# Altium PCB EboxPCB.PcbDoc
Units mil, origin at the board's own origin, x right, y up, seen from the top; angles counter-clockwise.
Board outline 6533 x 3937.01 mil, 2 copper layers (Signal, Ground); 45 components, 32 nets, 81 pads, 0 vias.
Unrouted connection lines stored in the file: 16.
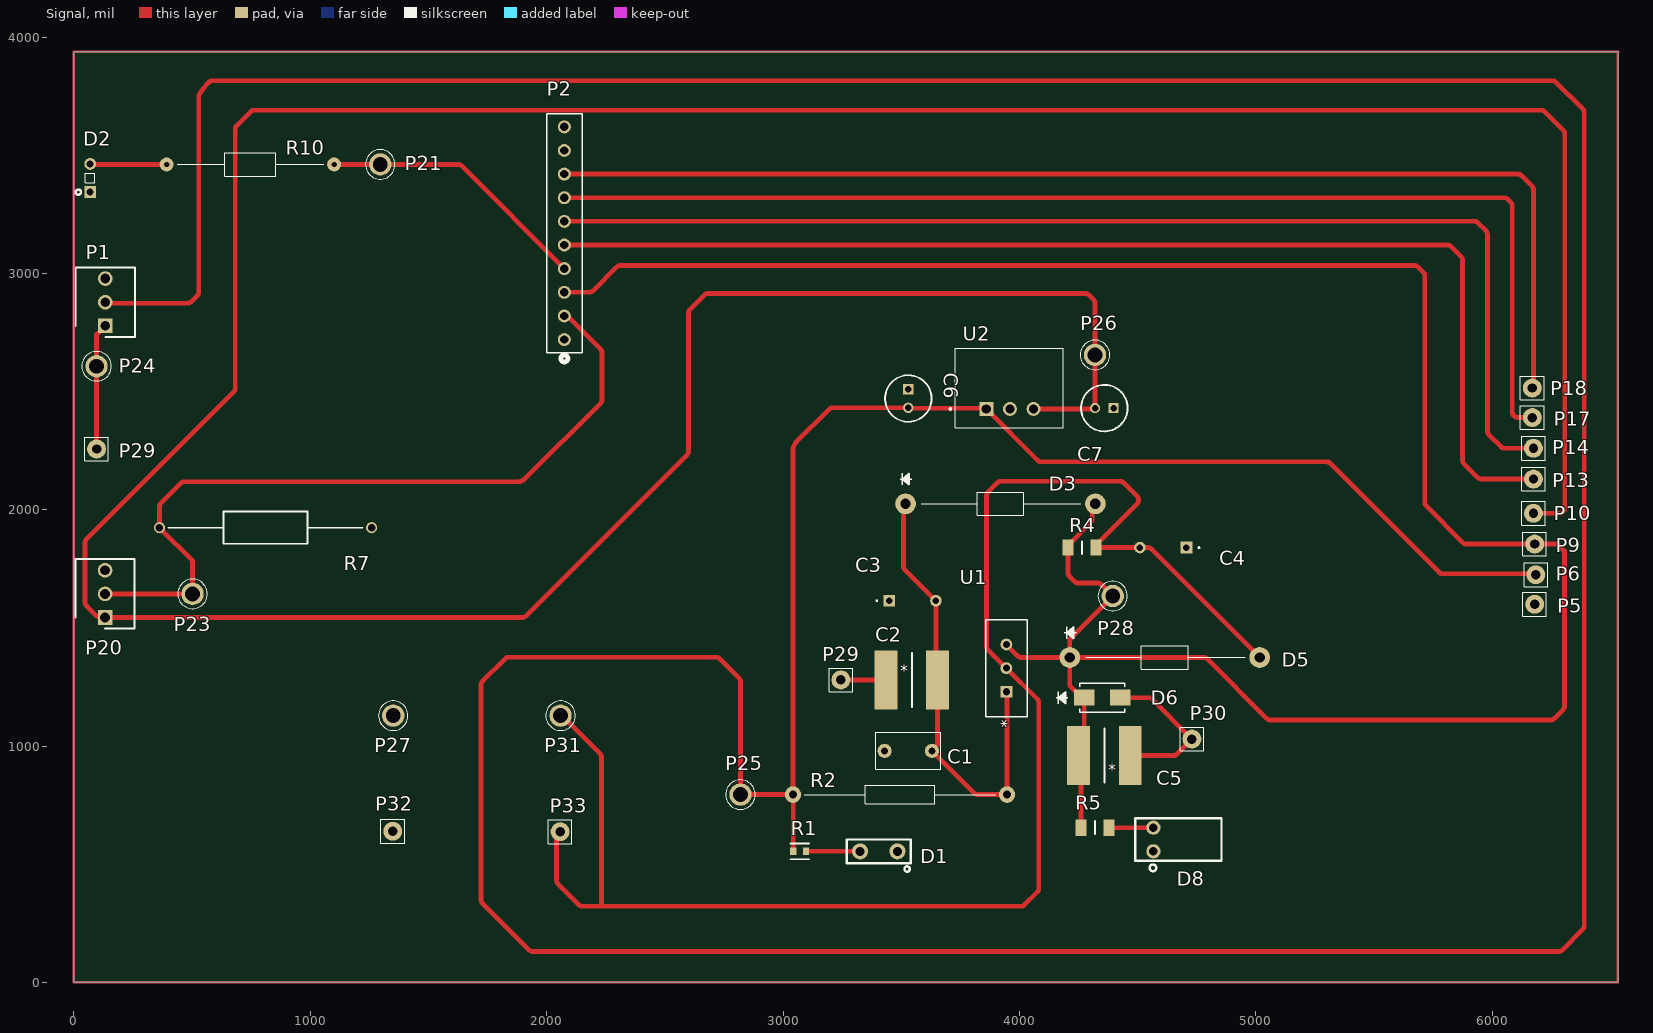
[diagram p0: Signal view]
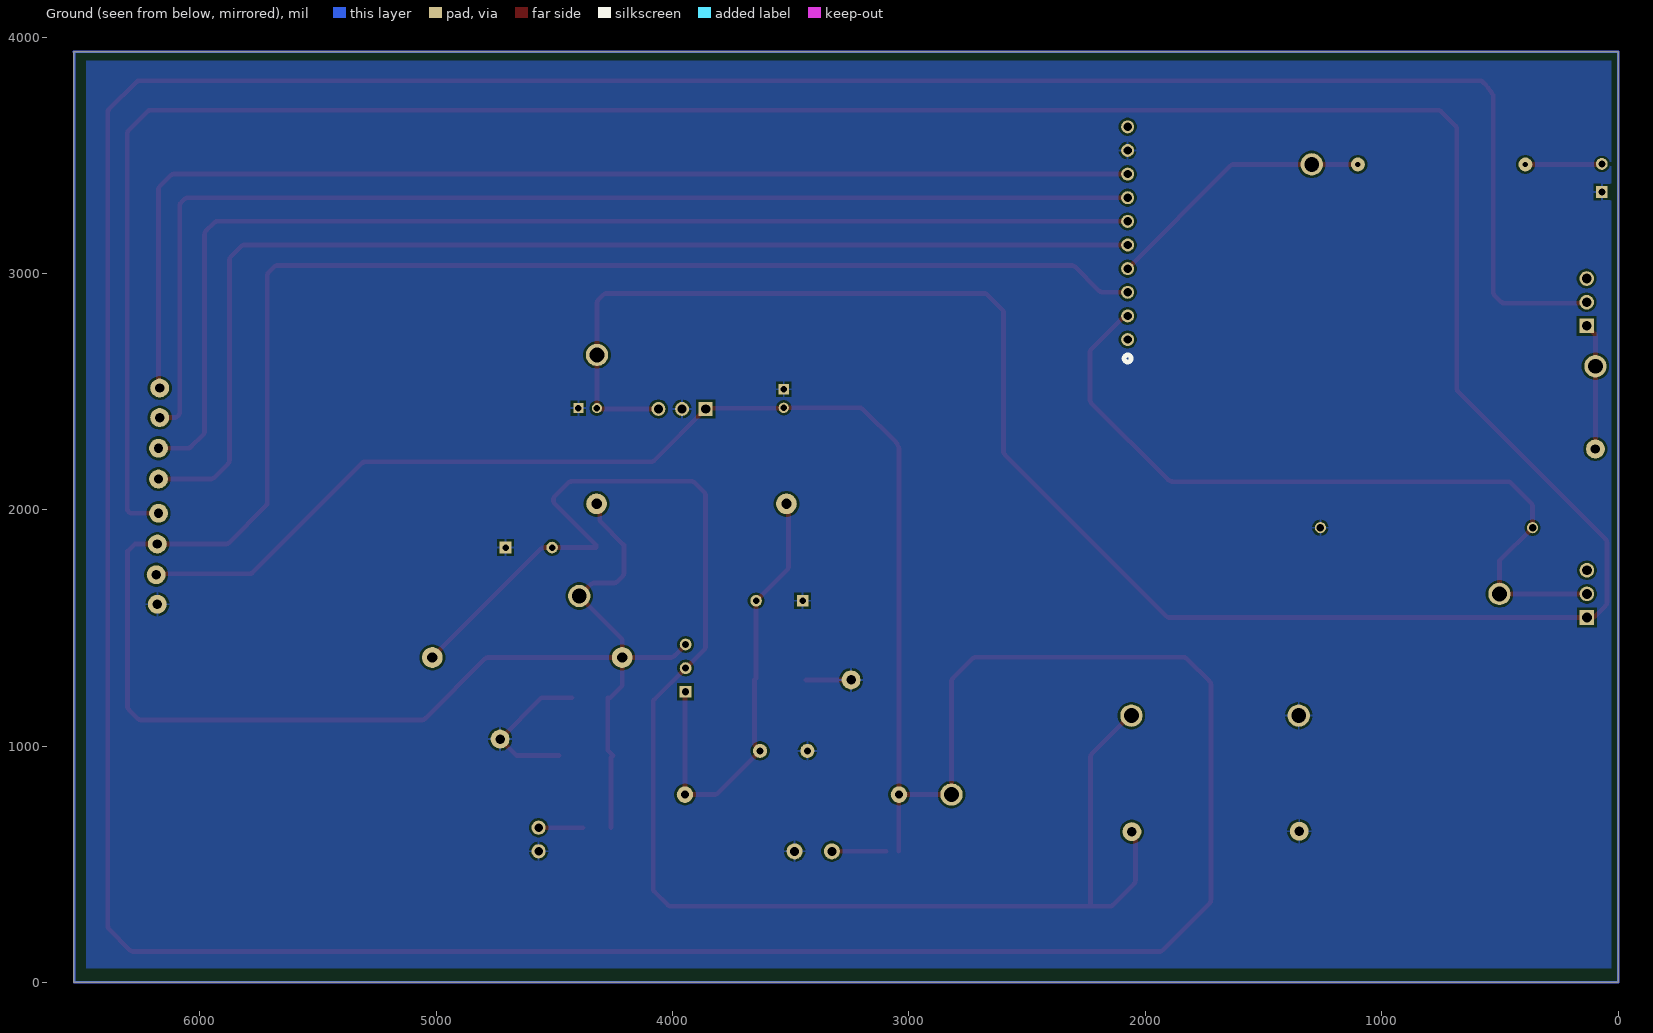
[diagram p1: Ground view, seen from below]
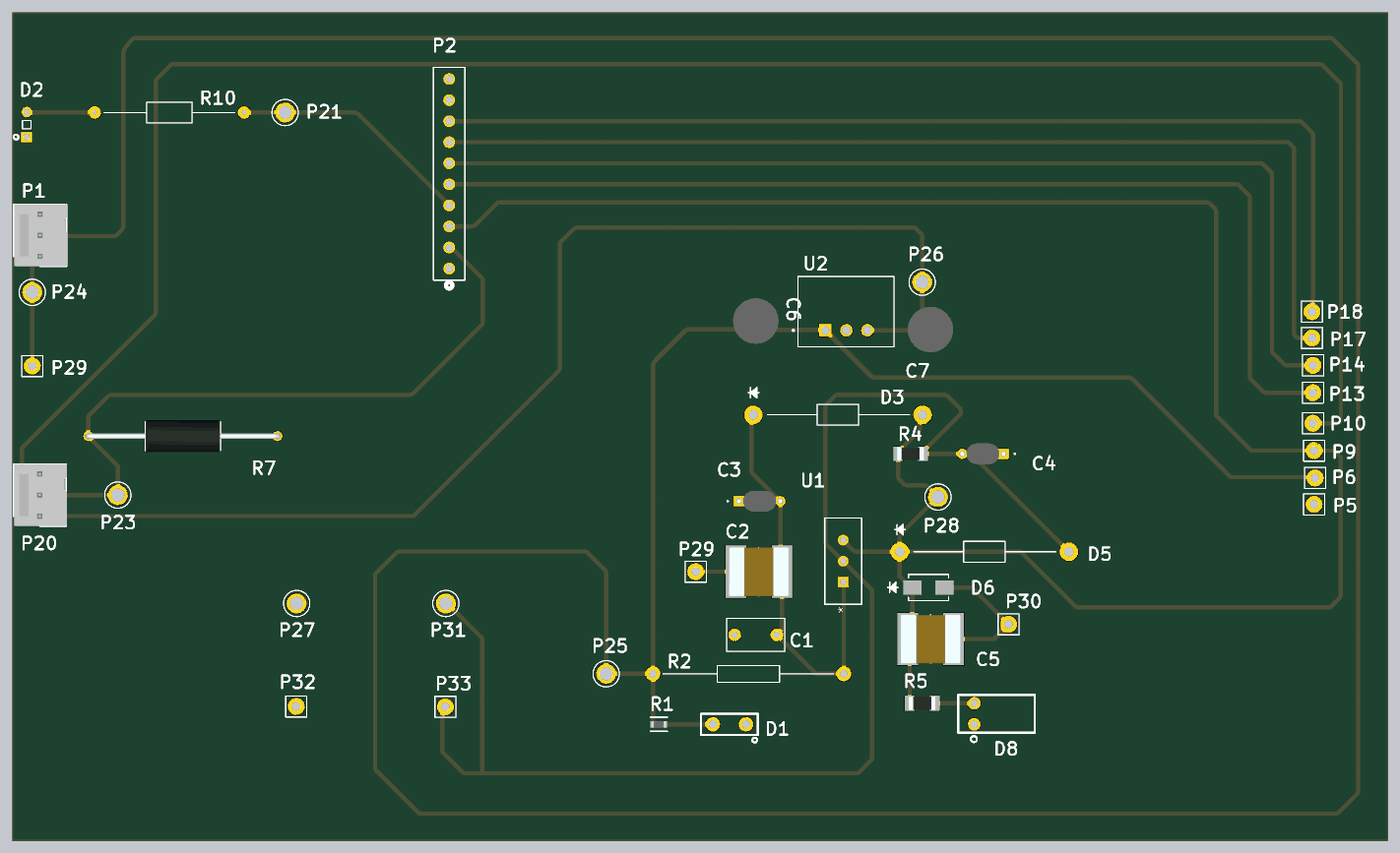
[diagram p2: 3D render of the assembled board from above, using the file's embedded part models]

## Layer stack, top to bottom
Top Solder: solder mask 0.4, Solder Resist, Dk 3.5
Signal: signal copper 1.4
Dielectric 1: dielectric 12.6, FR-4, Dk 4.8
Ground: signal copper 1.4
Bottom Solder: solder mask 0.4, Solder Resist, Dk 3.5

## Board outline
0,0 6533,0 6533,3937.01 0,3937.01

## Design rules (kind name [scope] priority, off if disabled: settings)
Clearance [All] p1: gap=10 ignorepadtopadclearanceinfootprint=FALSE except(0: Arc-Hole Track-Hole SMDPad-Hole THPad-Hole Via-Hole Fill-Hole Poly-Hole Region-Hole Text-Hole)
PolygonConnect [All] p1: connectstyle=Relief reliefconductorwidth=10 reliefentries=4 polygonreliefangle="90 Angle" airgapwidth=10
RoutingVias [All] p1: holewidth=28 width=50 viastyle="Through Hole" minholewidth=28 minwidth=50 maxholewidth=28 maxwidth=50
SolderMaskExpansion [All] p1: expansion=4 istentingtop=FALSE
Width [All] p1 off: maxlimit=10 minlimit=10 preferedwidth=10
30 further rules are at their usual default settings.

## Classes and differential pairs
component class EBoxschematic: P2

## Components (designator, comment, footprint, x,y, rotation, side; value= is the part's Value field where it differs from the comment)
C1 "0.1u" 0.1uF 3530,980 r0 top
C2 "10u" "100uF Tantalum" 3545,1280 r0 top
C3 "1u" 1uF 3450,1615 r0 top
C4 "Capacitor" 1uF 4706.85,1840 r180 top
C5 "100u" "100uF Tantalum" 4360,960 r180 top
C6 "10u" 10uF 3530,2510 r270 top
C7 "10u" 10uF 4398.74,2430 r180 top
D1 "LED" "LED 12V Thru Hole" 3405,555 r180 top
D2 "LED" "LED 5V Arduino Thru Hole" 69,3403.94 r90 top
D3 "Diode" "Protective Diode" 3920,2025 r0 top
D5 "Diode" "Protective Diode" 4615,1375 r0 top
D6 "Diode" "Schottky Diode" 4350,1205 r0 top
D8 "LED" "LED 5V Thru Hole" 4740,605 r180 top
P1 "Switch" "3x1 KK Molex" 133,2778 r90 top
P2 "1x10 female header" "1x10 header pin" 2075,2720 r90 top
P5 "SIG4" Via#1 6180,1600 r0 top
P6 "SIG3" Via#1 6185,1725 r0 top
P9 "SIG2" Via#1 6180,1855 r0 top
P10 "SIG1" Via#1 6175,1985 r0 top
P13 "5V" Via#1 6175,2130 r0 top
P14 "10V" Via#1 6175,2260 r0 top
P17 "28V" Via#1 6170,2390 r0 top
P18 "GND" Via#1 6170,2515 r0 top
P20 "Button" "3x1 KK Molex" 132,1544 r90 top
P21 "Test Point" "Test Point" 1296,3461 r90 top
P23 "Test Point" "Test Point" 502,1644 r90 top
P24 "Test Point" "Test Point" 96,2607 r90 top
P25 "Test Point" "Test Point" 2820,795 r0 top
P26 "Test Point" "Test Point" 4320,2655 r0 top
P27 "Test Point" "Test Point" 1351,1129 r270 top (schematic designator P23)
P28 "Test Point" "Test Point" 4395,1635 r180 top
P29 "Comment" Via#2 3245,1280 r0 top
P29 "Comment" Via#1 96,2257 r90 top
P30 "Comment" Via#3 4730,1030 r0 top
P31 "Test Point" "Test Point" 2059,1129 r270 top (schematic designator P23)
P32 "Comment" Via#1 1349,640 r0 top
P33 "Comment" Via#1 2057,638 r0 top
R1 "1.5k" "LV Resistor" 3070,555 r0 top
R2 "1.5" "1.5 Ohm" 3495,795 r180 top
R4 "249" "249 Ohm" 4265,1840 r0 top
R5 "340" "340 Ohm" 4320,655 r0 top
R7 "Comment" "1.5k Ohm" 1259.64,1924 r180 top
R10 "220" "Arduino Resistors" 746.67,3461 r0 top
U1 "Linear Regulator" "Linear Regulator" 3945,1230 r90 top
U2 "Step Down Converter" "Step Down Converter" 3960,2515 r0 top

## Footprints (in the part's own frame and the unit in brackets; to place one, negate y for a bottom-side part, rotate by r counter-clockwise, add the part's x,y. Pads: shape width x height; smd on the part's side, far side on the other; paste and mask are expansions set on the pad)
0.1uF [mil] "C322C104K5R5TA7305"
  round 60 hole 30: 1(-100,0) 2(100,0)
  silkscreen extent -138,-79 138,79
"1.5 Ohm" [mil] "PR01000101508JR500"
  round 70 hole 35: 1(-452.76,0) 2(452.76,0)
  silkscreen extent -405,-39 405,39
"1.5k Ohm" [mm] "RESAD2280W60L900D345"
  round 1.2 hole 0.8: 1(0,0) 2(22.8,0)
  silkscreen extent 0.95,-1.73 21.85,1.73, body extent -0.3,-1.95 23.1,1.95, height 3.9
1uF [mm] "FG28"
  rect 1.25x1.25 hole 0.7: 1(0,0)
  round 1.25 hole 0.7: 2(5,0)
  silkscreen extent -1.4,-0.05 -1.3,0.05, body extent -0.25,-1.25 5.25,1.25, height 5.6
"1x10 header pin" [mil] "5-535541-8_TYC"
  round 55 hole 35 mask+0: A1(0,0) A2(100,0) A3(200,0) A4(300,0) A5(400,0) A6(500,0) A7(600,0) A8(700,0) A9(800,0) A10(900,0)
  silkscreen extent -95,-75 955,75, body extent 0,0 10,10, height 10
"3x1 KK Molex" [mm] "22112032 - HDRV3W87P0X254_1X3_747X635X1105P"
  rect 1.575x1.575 hole 1.05: 1(0,0)
  round 1.575 hole 1.05: 2(2.54,0) 3(5.08,0)
  silkscreen extent -1.19,-3.17 6.27,3.18, body extent -1.19,-3.24 6.27,3.11, height 10.65
10uF [mm] "CAPPRD200W52D500H1250"
  rect 1.1x1.1 hole 0.7: 1(0,0)
  round 1.1 hole 0.7: 2(2,0)
  silkscreen extent -1.5,-2.5 3.5,2.5, body extent -1.75,-2.75 3.75,2.75, height 12.5
"100uF Tantalum" [mm] "CAPC7360X200N"
  rect 2.47x6.32 smd: 1(-2.77,0) 2(2.77,0)
  silkscreen extent 0,-2.9 0,2.9, body extent -3.65,-3 3.65,3, height 2
"249 Ohm" [mm] "RESC3216X70N"
  rect 1.15x1.7 smd: 1(-1.5,0) 2(1.5,0)
  silkscreen extent 0,-0.67 0,0.67, body extent -1.6,-0.77 1.6,0.77, height 0.7
"340 Ohm" [mm] "RESC3216X75N"
  rect 1.2x1.8 smd: 1(-1.5,0) 2(1.5,0)
  silkscreen extent 0,-0.7 0,0.7, body extent -1.6,-0.8 1.6,0.8, height 0.75
"Arduino Resistors" [mm] "Through-hole"
  round 1.5 hole 0.564: 1(-9,0) 2(9,0)
  silkscreen extent -7.87,-1.25 7.87,1.25
"LED 5V Arduino Thru Hole" [mm]
  rect 1.27x1.27 hole 0.754: 1(-1.5,0)
  round 1.27 hole 0.754: 2(1.5,0)
  silkscreen extent -1.81,-0.51 0.51,1.55
"LED 5V Thru Hole" [mil] "WP934EW/GD5V"
  round 60 hole 35.43: 1(173,50) 2(173,-50)
  silkscreen extent -115,-90 249,134
"LED 12V Thru Hole" [mil] "609-1112-130F"
  round 67.99 hole 38: 1(-78.74,0) 2(78.74,0)
  silkscreen extent -135,-50 135,86
"Linear Regulator" [mil] "TO220-3_ONS"
  rect 50x50 hole 30 mask+0: 1(0,0)
  round 50 hole 30 mask+0: 2(100,0) 3(200,0)
  silkscreen extent -105,-88 305,88, body extent 0,0 10,10, height 10
"LV Resistor" [mil] "Yageo_AC0603_IPC_C"
  rect 25.93x31.97 smd paste+0 mask+0: 1(-26.64,0) 2(26.64,0)
  silkscreen extent -40,-33 40,33, body extent -44,-22 44,22, height 10
"Protective Diode" [mm] "1N4002-E3/54"
  round 2.228 hole 1.114: 1(-10.2,0) 2(10.2,0)
  silkscreen extent -10.79,-1.25 8.64,3.3
"Schottky Diode" [mil] "SMA_STM"
  rect 87x67 smd paste+0 mask+0: 1(-76,0) 2(76,0)
  silkscreen extent -194,-62 96,62, body extent 0,0 10,10, height 10
"Step Down Converter" [mm] "CONV_R-78E5.0-1.0"
  rect 1.508x1.508 hole 1: 1(-2.54,-2.25)
  round 1.508 hole 1: 2(0,-2.25) 3(2.54,-2.25)
  silkscreen extent -6.5,-4.25 5.75,4.25
"Test Point" [mm] "TESTPOINT_5013"
  round 2.4 hole 1.6: 1(0,0)
  silkscreen extent -1.58,-1.59 1.58,1.59
Via#1 [mil]
  round 80 hole 40: VIA(0,0)
  silkscreen extent -50,-50 50,50
Via#2 [mil]
  round 80 hole 40: P29(0,0)
  silkscreen extent -50,-50 50,50
Via#3 [mil]
  round 80 hole 40: P30(0,0)
  silkscreen extent -50,-50 50,50

## Part data
C1 C3 C6 C7: library part Capacitor
C2 C5: library part "Tantalum Capacitor"
P1 P20: library part "KK 254 1x3 male header", "22112032"
P2: "5-535541-8"
P5 P6 P9 P10 P13 P14 P17 P18: library part "Output Point"
R1 R2 R4 R5 R10: library part Resistor
U1: "511-LM317BT"
U2: "R-78E5.0-1.0"

## Nets (pads, with @x,y where several pads share a name; then routed paths per layer and width w, separated by ;. In a path a pad name is that pad's centre, name@x,y a point inside that pad or via, vN(x,y) a via of type N, cw(c..) or ccw(c..) an arc to the next point about the centre after c; other vN are vias at no path point)
5V: C7.2 P10.VIA P20.1 P26.1 U2.3 | length 15642.6
  Signal w10: C7.2@4311.35,2426.42 ccw(c4311.35,2438.65) C7.2
  Signal w20: U2.3 C7.2@4311.35,2426.42 ; C7.2 P26.1 4320,2873.72 4320,2873.78 ccw(c4300,2873.72) 4314.18,2887.82 4292.8,2909.2 ccw(c4278.72,2895) 4278.72,2915 2682.03,2915 ccw(c2682.03,2895) 2667.93,2909.18 2605.8,2847.05 ccw(c2620,2832.97) 2600,2833.03 2600,2247.28 cw(c2580,2247.28) 2594.2,2233.2 1910.83,1549.83 cw(c1896.72,1564) 1896.72,1544 P20.1 131.5,1544.5 111.22,1544.5 cw(c111.28,1564.5) 97.2,1550.3 53.08,1594.42 cw(c67.25,1608.53) 47.25,1608.53 47.25,1861.47 cw(c67.25,1861.47) 53.11,1875.61 676.64,2499.14 ccw(c662.5,2513.28) 682.5,2513.28 682.5,3609.97 cw(c702.5,3609.97) 688.36,3624.11 748.67,3684.42 cw(c762.78,3670.25) 762.78,3690.25 6207.97,3690.25 cw(c6207.97,3670.25) 6222.05,3684.45 6301.42,3605.08 cw(c6287.25,3590.97) 6307.25,3590.97 6307.25,2005 cw(c6287.25,2005) 6287.25,1985 P10.VIA
10V: C5.2 D3.2 D5.1 D6.1 P2.A3 P9.VIA P28.1 R4.1 R5.1 U1.3 | length 10190.6
  Signal w20: P2.A3 2180.15,2920 ccw(c2180.15,2940) 2186.58,2921.06 2188.95,2921.86 ccw(c2182.52,2940.8) 2196.61,2926.61 2297.64,3027.64 cw(c2311.78,3013.5) 2311.78,3033.5 5671.72,3033.5 cw(c5671.72,3013.5) 5685.83,3027.67 5709.18,3004.32 cw(c5695,2990.22) 5715,2990.28 5715,2990.22 5715,2030.28 ccw(c5735,2030.28) 5720.82,2016.18 5876.17,1860.83 ccw(c5890.28,1875) 5890.28,1855 P9.VIA 6276,1855 6306,1825 6306,1168.28 cw(c6286,1168.28) 6300.2,1154.2 6262.36,1116.36 cw(c6248.22,1130.5) 6248.22,1110.5 5061.28,1110.5 cw(c5061.28,1130.5) 5047.14,1116.36 4794.3,1369.2 ccw(c4780.22,1355) 4780.22,1375 D5.1 ; U1.3@3945,1429.75 3993.92,1380.83 ccw(c4008.03,1395) 4008.03,1375 D5.1 ; R5.1 4260.94,950 C5.2 4274,983.06 D6.1 4264,1205 4213.43,1255.57 D5.1 ; D3.2 4308.62,2012.04 4308.62,1953.5 4205.94,1850.83 4205.94,1732.78 ccw(c4225.94,1732.78) 4211.77,1718.67 4234.34,1696.11 4234.37,1696.07 ccw(c4248.48,1710.25) 4248.48,1690.25 4331.47,1690.25 cw(c4331.47,1670.25) 4345.58,1684.42 P28.1 4219.25,1459.25 ccw(c4233.43,1445.14) 4213.43,1445.14 D5.1
28V: P1.1 P24.1 P29.VIA | length 536.3
  Signal w20: P29.VIA P24.1 96,2741 P1.1
28VEdited: 
GND: C1.1 C2.1 C3.1 C4.1 C5.1 C6.1 C7.1 D1.1 D2.1 D6.2 D8.1 P2.A9 P5.VIA P27.1 P29.P29 P30.P30 P32.VIA R7.1 U2.2 | length 854.4
  Signal w10: C5.1@4479.06,960 C5.1@4484.06,955
  Signal w20: P29.P29 C2.1 ; D6.2 4555,1205 P30.P30 4660,960 C5.1@4479.06,960
LED: P2.A4 P21.1 R10.2 | length 1155.8
  Signal w20: R10.2 1625.72,3461 cw(c1625.72,3441) 1639.86,3455.14 P2.A4
NetC1_2: C1.2 C2.2 C3.2 D3.1 R2.1 U1.1 | length 1945.3
  Signal w10: U1.1 U1.1@3947.76,1227.24
  Signal w20: D3.1 3515.46,2022.03 ccw(c3529.6,2007.89) 3509.6,2007.89 3509.6,1760.53 ccw(c3529.6,1760.53) 3515.43,1746.42 C3.2 3646.85,1287.2 C2.2 ; C2.2@3653.9,1279.78 3653.9,1012.18 cw(c3633.9,1012.18) 3648.04,998.04 C1.2 3809.17,800.83 ccw(c3823.28,815) 3823.28,795 R2.1 U1.1@3947.76,1227.24
NetC2_2: C4.2 D5.2 P31.1 P33.VIA R4.2 U1.2 | length 6835.4
  Signal w20: P33.VIA 2047.86,628.86 ccw(c2062,614.72) 2042,614.72 2042,432.03 ccw(c2062,432.03) 2047.83,417.92 2137.96,327.79 ccw(c2152.03,342) 2151.94,322 2232,322 ; P31.1 cw(c2056.85,1109.12) 2070.99,1123.26 2226.17,968.08 cw(c2212,953.97) 2232,953.97 2232,322 ; D5.2 5003.65,1387.93 4557.38,1834.2 ccw(c4543.29,1820) 4543.29,1840 C4.2 R4.2 4324.06,1850.83 4498.14,2024.91 ccw(c4484,2039.06) 4504,2039.06 4504,2042.72 ccw(c4484,2042.72) 4498.14,2056.86 4440.8,2114.2 ccw(c4426.72,2100) 4426.72,2120 3920.53,2120 ccw(c3920.53,2100) 3906.43,2114.18 3866.33,2074.08 ccw(c3880.5,2059.97) 3860.5,2059.97 3860.5,1422.78 ccw(c3880.5,1422.78) 3866.32,1408.68 3866.36,1408.64 U1.2 4076.67,1198.33 cw(c4062.5,1184.22) 4082.5,1184.22 4082.5,397.78 cw(c4062.5,397.78) 4076.64,383.64 4020.97,327.97 cw(c4006.89,342.17) 4010.91,322.58 4010.08,322.41 cw(c4006.06,342) 4006.06,322 2232,322
NetC3_3: C6.2 P1.2 P6.VIA P25.1 R1.1 R2.2 U2.1 | length 23468.2
  Signal w10: R2.2 R2.2@3042.8,794.44 ; R1.1@3042.8,555.56 R1.1
  Signal w20: P1.2 ccw(c145,2894) 145,2874 481.07,2874 ccw(c481.07,2894) 490.1,2876.15 491.41,2876.82 ccw(c482.38,2894.66) 496.47,2880.47 522.14,2906.14 ccw(c508,2920.28) 528,2920.28 528,3747.64 cw(c548,3747.57) 531.02,3758.14 cw(c778.83,3602.84) 571.55,3809.15 cw(c585.69,3795) 585.69,3815 6255.72,3815 cw(c6255.72,3795) 6269.89,3809.11 6383.42,3695.58 cw(c6369.25,3681.47) 6389.25,3681.47 6389.25,238.53 cw(c6369.25,238.53) 6383.45,224.45 6295.82,136.82 cw(c6281.72,151) 6281.72,131 1941.47,131 cw(c1941.53,151) 1927.45,136.8 1728.58,335.67 cw(c1742.75,349.78) 1722.75,349.78 1722.75,1260.03 cw(c1742.75,1259.97) 1728.55,1274.05 1824.42,1369.92 cw(c1838.53,1355.75) 1838.53,1375.75 2717.22,1375.75 cw(c2717.22,1355.75) 2731.36,1369.89 2814.18,1287.07 cw(c2800,1272.97) 2820,1273.03 2820,1272.97 P25.1 R2.2 3042.24,2257.46 cw(c3062.24,2257.46) 3044.4,2266.49 3051.07,2279.66 cw(c3068.91,2270.63) 3054.72,2284.72 3195.4,2425.4 cw(c3209.54,2411.26) 3209.54,2431.26 C6.2 3532.42,2428.84 3857.58,2428.84 U2.1 4078.06,2208.36 4078.1,2208.32 ccw(c4092.2,2222.5) 4092.2,2202.5 5300.22,2202.5 cw(c5300.22,2182.5) 5314.36,2196.64 5776.21,1734.79 ccw(c5790.28,1749) 5790.19,1729 6181,1729 P6.VIA ; R1.1@3042.8,555.56 R2.2@3042.8,794.44
NetD1_2: D1.2 R1.2 | length 229.6
  Signal w20: R1.2 D1.2
NetD2_2: D2.2 R10.1 | length 323.3
  Signal w20: D2.2@69,3461 R10.1
NetD4_2: 
NetD7_2: 
NetD8_2: D8.2 R5.2 | length 187.9
  Signal w20: R5.2 D8.2
NetP19_2: 
NetP20_2: 
NetR3_1: 
NetR8_1: 
NetR9_1: 
NetR11_1: 
NetR12_1: 
NetR13_1: 
NetR14_1: 
NetR15_1: 
NetR16_A: 
ONOFF: P2.A2 P20.2 P23.1 R7.2 | length 3292.3
  Signal w10: 2072.5,2722.5 2075,2720
  Signal w20: P20.2 P23.1 502,1784 R7.2 362,2013.53 cw(c382,2013.47) 367.8,2027.55 453.43,2113.18 cw(c467.53,2099) 467.47,2119 ; 467.52,2119 1884,2119 ccw(c1884,2139) 1892.61,2120.95 1899.72,2124.34 ccw(c1891.11,2142.39) 1905.2,2128.2 2228.39,2451.39 ccw(c2214.25,2465.53) 2234.25,2465.53 2234.25,2665.22 ccw(c2214.25,2665.22) 2228.42,2679.33 2093.55,2814.2 ccw(c2079.47,2800) 2079.47,2820 P2.A2
PWR: 
ResTest: 
SIG1: P2.A5 P13.VIA | length 5012.9
  Signal w20: P2.A5 5811.72,3120 cw(c5811.72,3100) 5825.83,3114.17 5869.18,3070.82 cw(c5855,3056.72) 5875,3056.78 5875,3056.72 5875,2209.03 ccw(c5895,2209.03) 5880.82,2194.93 5939.92,2135.83 ccw(c5954.03,2150) 5954.03,2130 P13.VIA
SIG2: P2.A6 P14.VIA | length 4992
  Signal w20: P2.A6 5925.22,3220 cw(c5925.22,3200) 5939.33,3214.17 5974.18,3179.32 cw(c5960,3165.22) 5980,3165.28 5980,3165.22 5980,2332.03 ccw(c6000,2332.03) 5985.82,2317.93 6037.92,2265.83 ccw(c6052.03,2280) 6052.03,2260 P14.VIA
SIG3: P2.A7 P17.VIA | length 4997.8
  Signal w20: P2.A7 6051.22,3320 cw(c6051.22,3300) 6065.33,3314.17 6079.18,3300.32 cw(c6065,3286.22) 6085,3286.28 6085,3286.22 6085,2413.28 ccw(c6105,2413.28) 6090.82,2399.18 6094.17,2395.83 ccw(c6108.28,2410) 6108.28,2390 P17.VIA
SIG4: P2.A8 P18.VIA | length 4971.7
  Signal w10: P18.VIA P18.VIA@6175,2520
  Signal w20: P2.A8 6109.22,3420 cw(c6109.22,3400) 6123.33,3414.17 6169.18,3368.32 cw(c6155,3354.22) 6175,3354.28 6175,3354.22 P18.VIA@6175,2520
pads on no net: P1.3 P2.A1 P2.A10 P20.3

## Polygon pours and split planes (outlines as drawn)
GND on Ground "GND_L02_P001" (solid, pour order 1): 30,3900 6480,3900 6480,60 30,60

## Other copper
Multi-Layer:
  lines w10: 6532,3936 6532,1 0,1 0,3937 6533,3937

## Text inside footprints (layer, text, board x,y; h text height)
C2: Top Overlay "*" at 3495,1295 h50
C5: Top Overlay "*" at 4410,945 h50 r180
U1: Top Overlay "*" at 3970,1077.5 h50 r90; Mechanical 13 "*" at 3970,1127.5 h50 r90